# Altium PCB EE311_Example_Boost_PCB.PcbDoc
Units mm, origin at the board's own origin, x right, y up, seen from the top; angles counter-clockwise.
Board outline 68 x 69 mm, 2 copper layers (Top Layer, Bottom Layer); 67 components, 26 nets, 164 pads, 108 vias.
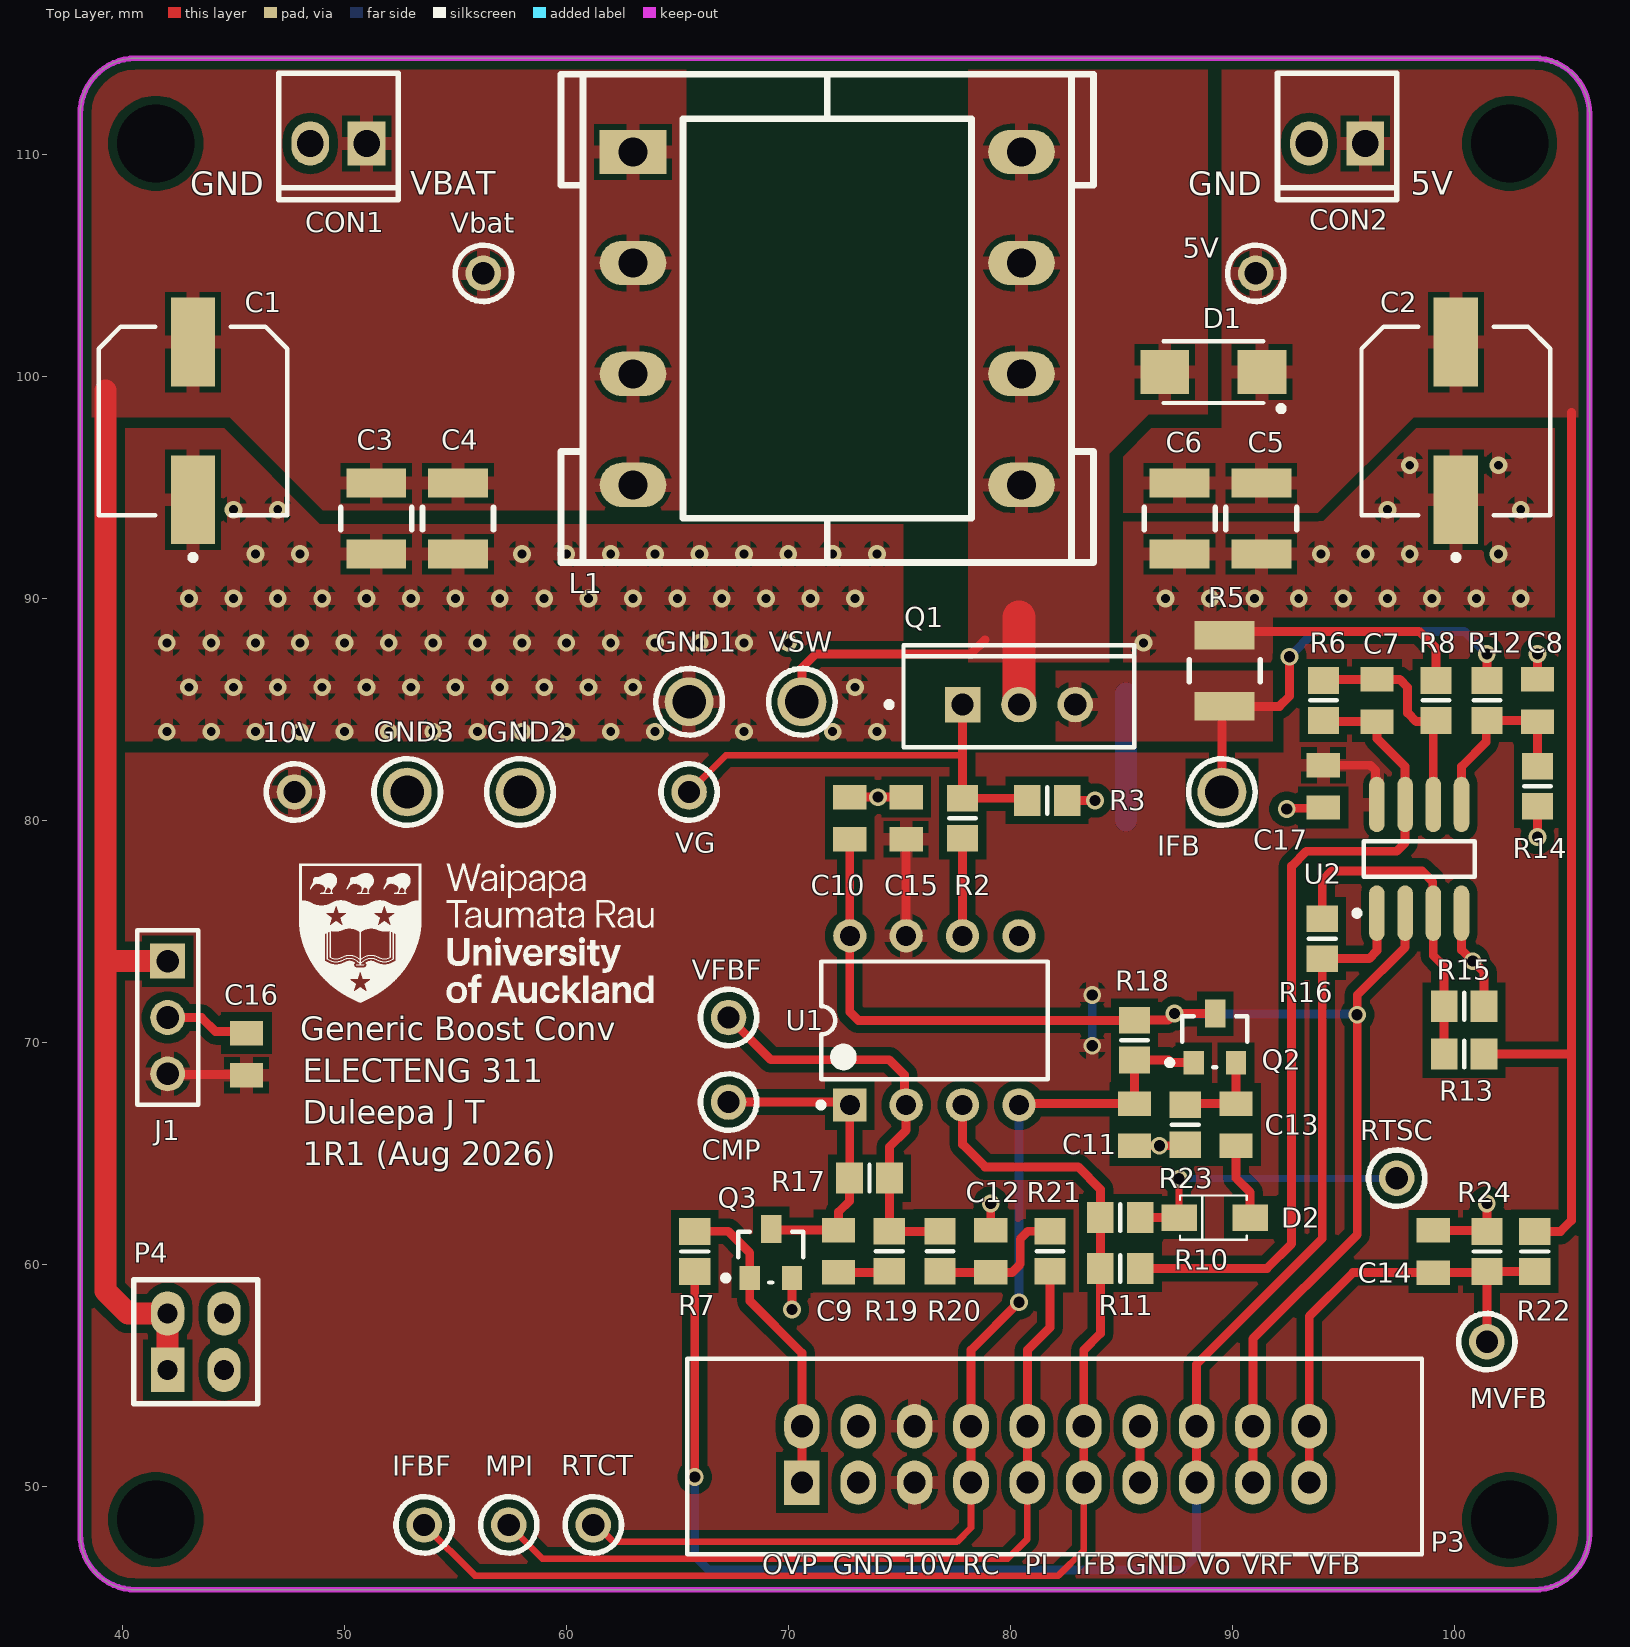
[diagram p0: Top Layer view]
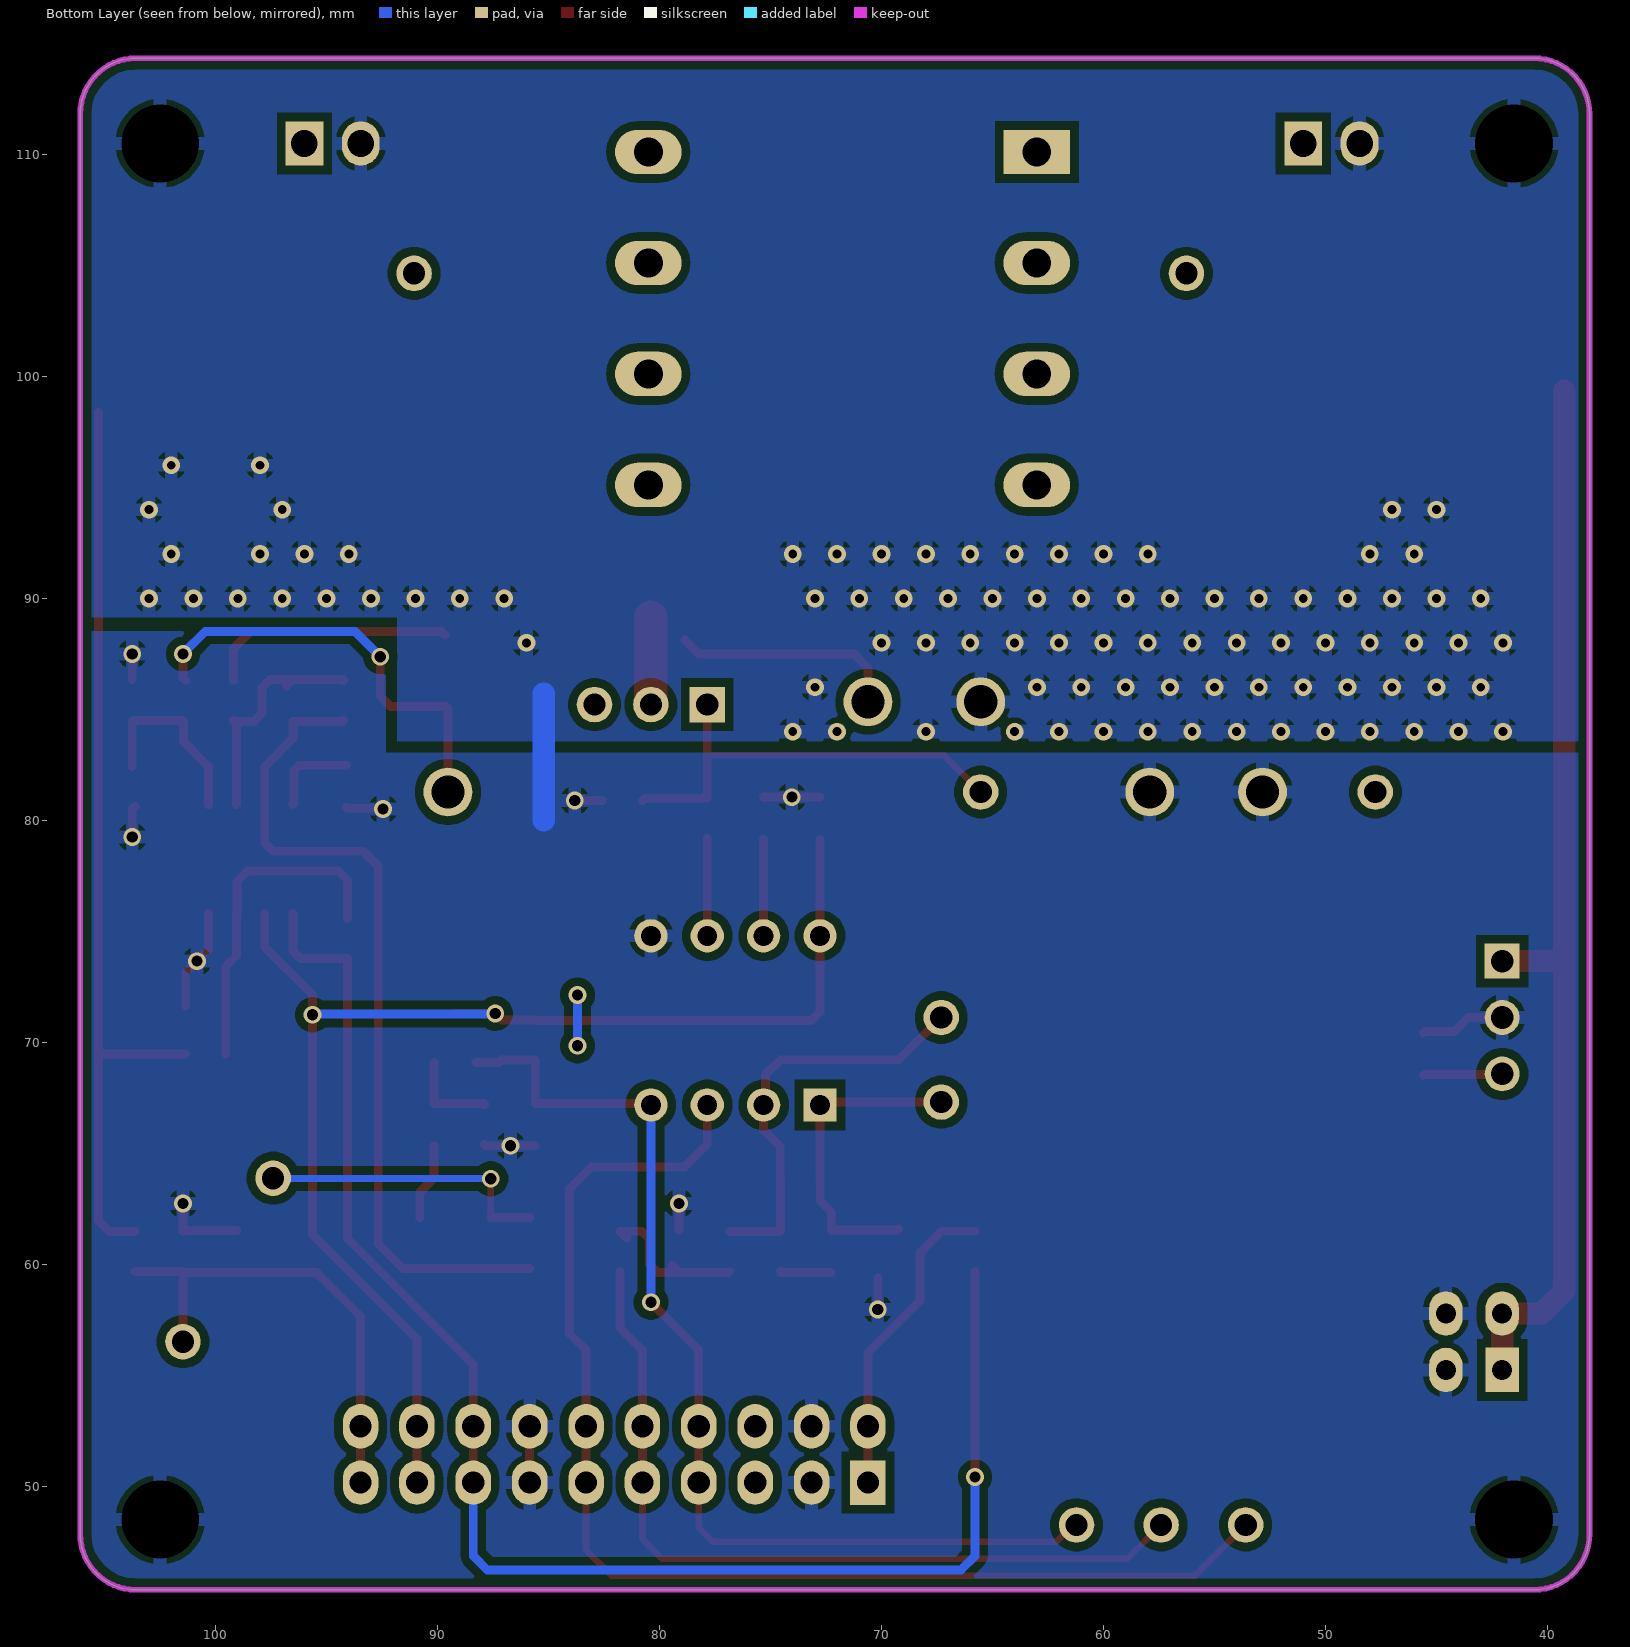
[diagram p1: Bottom Layer view, seen from below]

## Layer stack, top to bottom
Top Solder: solder mask 0.0102, Solder Resist, Dk 3.5
Top Layer: signal copper 0.0356
Dielectric 1: dielectric 0.32, FR-4, Dk 4.8
Bottom Layer: signal copper 0.0356
Bottom Solder: solder mask 0.0102, Solder Resist, Dk 3.5

## Board outline
38.1,47.839 38.1,111.839 cw(c40.6,111.839) 40.6,114.339 103.6,114.339 cw(c103.6,111.839) 106.1,111.839 106.1,47.839 cw(c103.6,47.839) 103.6,45.339 40.6,45.339 cw(c40.6,47.839)

## Design rules (kind name [scope] priority, off if disabled: settings)
BoardOutlineClearance [All] p1: gap=0.3 ignorepadtopadclearanceinfootprint=FALSE except(0.4: Arc-SplitBarrior Arc-SplitContinuation Track-SplitBarrior Track-SplitContinuation SMDPad-SplitBarrior SMDPad-SplitContinuation THPad-SplitBarrior THPad-SplitContinuation Via-SplitBarrior Via-SplitContinuation Fill-SplitBarrior Fill-SplitContinuation Poly-SplitBarrior Poly-SplitContinuation Region-SplitBarrior Region-SplitContinuation Text-SplitBarrior Text-SplitContinuation)
Clearance [All] p1: gap=0.381 ignorepadtopadclearanceinfootprint=TRUE
Height [All] p1: minheight=0 maxheight=50 prefheight=12.7
HoleSize [All] p1: absolutevalues=TRUE maxlimit=12 minlimit=0.25 maxpercent=80.000 minpercent=20.000
MinimumAnnularRing [All] p1: minimumring=0.13
MinimumSolderMaskSliver [All] p1: minsoldermaskwidth=0.1
PolygonConnect PolygonConnect_RShunt [InComponent('R5')] p1: connectstyle=Direct reliefconductorwidth=0.508 reliefentries=4 polygonreliefangle="90 Angle" airgapwidth=0.254
PolygonConnect [All] p2: connectstyle=Relief reliefconductorwidth=0.6 reliefentries=4 polygonreliefangle="90 Angle" airgapwidth=0.254
RoutingCorners [All] p1: cornerstyle=Round minsetback=2.54 maxsetback=2.54
RoutingVias [All] p1: holewidth=0.4 width=0.65 viastyle="Through Hole" minholewidth=0.25 minwidth=0.4 maxholewidth=1 maxwidth=2
SilkToSilkClearance [All] p1: silktosilkclearance=0.1
SilkToSolderMaskClearance [IsPad] p1: minsilkscreentomaskgap=0.1 clearancetoexposedcopper=TRUE
SolderMaskExpansion [All] p1: expansion=0.102 istentingtop=FALSE
SupplyNets "Schematic Supply Nets_4" [InNet('Vbat')] p1: voltage=0.000
SupplyNets "Schematic Supply Nets_3" [InNet('GND')] p2: voltage=0.000
SupplyNets "Schematic Supply Nets_2" [InNet('10V')] p3: voltage=0.000
SupplyNets "Schematic Supply Nets_1" [InNet('VREF')] p4: voltage=0.000
SupplyNets "Schematic Supply Nets" [InNet('5V')] p5: voltage=0.000
Width [All] p1: maxlimit=10.16 minlimit=0.127 preferedwidth=0.508
24 further rules are at their usual default settings.

## Components (designator, comment, footprint, x,y, rotation, side; value= is the part's Value field where it differs from the comment)
5V "TP TH" TP_TH_2.5mm 91.059,104.648 r0 top
10V "TP TH" TP_TH_2.5mm 47.752,81.28 r0 top
C1 "EEE-FK1K330P" FP-FKF-MFG 43.18,98 r90 top value=33µF
C2 "EEE-FK1K330P" FP-FKF-MFG 100.076,98 r90 top value=33µF
C3 "CCAP1210" C1210 51.435,93.599 r90 top
C4 "CCAP1210" C1210 55.118,93.599 r90 top
C5 "CCAP1210" C1210 91.313,93.599 r90 top
C6 "CCAP1210" C1210 87.63,93.599 r90 top
C7 "CCAP0805" C0805 96.52,85.405 r90 top
C8 "CCAP0805" C0805 103.759,85.405 r90 top
C9 "CCAP0805" C0805 72.263,60.59 r270 top
C10 "CCAP0805" C0805 72.771,80.099 r90 top
C11 "CCAP0805" C0805 85.598,66.294 r270 top
C12 "CCAP0805" C0805 79.121,60.59 r90 top
C13 "CCAP0805" C0805 90.17,66.294 r270 top
C14 "CCAP0805" C0805 99.06,60.579 r90 top
C15 "CCAP0805" C0805 75.311,80.099 r90 top
C16 "CCAP0805" C0805 45.593,69.469 r90 top
C17 "CCAP0805" C0805 94.107,81.534 r270 top
CMP "TP TH" TP_TH_2.5mm 67.31,67.31 r0 top
CON1 "HDR2X1" HDR2X1_2P54 51,110.5 r270 top
CON2 "HDR2X1" HDR2X1_2P54 96,110.5 r270 top
D1 "SSA34-E3/61T" FP-95400-MFG 89.154,100.203 r180 top
D2 "1N4148_SMT_SOD123" SOD123 89.154,62.103 r180 top
GND1 "TP TH" TP_TH_3mm 65.532,85.344 r0 top
GND2 "TP TH" TP_TH_3mm 57.912,81.28 r0 top
GND3 "TP TH" TP_TH_3mm 52.832,81.28 r0 top
IFB "TP TH" TP_TH_3mm 89.535,81.28 r0 top
IFBF "TP TH" TP_TH_2.5mm 53.594,48.26 r0 top
J1 "HDR3X1" FP-22-28-4035-MFG 42.037,71.12 r270 top
L1 "Inductor EFD20" EFD20 71.755,102.616 r0 top
MPI "TP TH" TP_TH_2.5mm 57.404,48.26 r0 top
MVFB "TP TH" TP_TH_2.5mm 101.473,56.515 r0 top
P3 "HDR10X2" HDR10X2_2P54 82.042,51.435 r0 top
P4 "HDR2X2_TH" HDR2X2_2P54_Male 43.307,56.515 r0 top
Q1 "IPP052N06L3" TO220VH 80.391,85.217 r90 top
Q2 "MMBT2222A" SOT23SM 89.217,70.155 r90 top
Q3 "MMBT2222A" SOT23SM 69.215,60.452 r90 top
R2 "RES0805" R0805 77.851,80.099 r90 top
R3 "RES0805" R0805 81.661,80.899 r180 top
R5 "RES1210" R1210 89.662,86.741 r270 top
R6 "RES0805" R0805 94.107,85.405 r90 top
R7 "RES0805" R0805 65.786,60.579 r90 top
R8 "RES0805" R0805 99.187,85.405 r90 top
R10 "RES0805" R0805 84.963,62.103 r180 top
R11 "RES0805" R0805 84.963,59.817 r0 top
R12 "RES0805" R0805 101.473,85.405 r90 top
R13 "RES0805" R0805 100.446,69.469 r0 top
R14 "RES0805" R0805 103.759,81.534 r90 top
R15 "RES0805" R0805 100.446,71.628 r180 top
R16 "RES0805" R0805 94.057,74.676 r90 top
R17 "RES0805" R0805 73.66,63.881 r180 top
R18 "RES0805" R0805 85.598,70.104 r90 top
R19 "RES0805" R0805 74.549,60.59 r270 top
R20 "RES0805" R0805 76.835,60.59 r90 top
R21 "RES0805" R0805 81.788,60.59 r90 top
R22 "RES0805" R0805 103.632,60.579 r90 top
R23 "RES0805" R0805 87.884,66.294 r270 top
R24 "RES0805" R0805 101.473,60.579 r270 top
RTCT "TP TH" TP_TH_2.5mm 61.214,48.26 r0 top
RTSC "TP TH" TP_TH_2.5mm 97.409,63.881 r0 top
U1 "UC3843NG4" DIP-8 76.581,70.993 r90 top
U2 "LT6221" SOIC8 98.425,78.269 r90 top
Vbat "TP TH" TP_TH_2.5mm 56.261,104.648 r0 top
VFBF "TP TH" TP_TH_2.5mm 67.31,71.12 r0 top
VG "TP TH" TP_TH_2.5mm 65.532,81.28 r0 top
VSW "TP TH" TP_TH_3mm 70.612,85.344 r0 top

## Footprints (in the part's own frame and the unit in brackets; to place one, negate y for a bottom-side part, rotate by r counter-clockwise, add the part's x,y. Pads: shape width x height; smd on the part's side, far side on the other; paste and mask are expansions set on the pad)
C0805 [mm]
  rect 1.1x1.5 smd: 1(-0.95,0) 2(0.95,0)
  body extent -1.1,-0.72 1.1,0.72, height 1.1
C1210 [mm]
  rect 1.3x2.7 smd: 1(-1.6,0) 2(1.6,0)
  silkscreen extent -0.5,-1.6 0.5,1.6, body extent -1.8,-1.4 1.8,1.4, height 1.24
DIP-8 [mm] "DIP, 8-Leads, Row Spacing 7.62mm, Pitch 2.54mm, Body 9.6x6.4mm"
  rect 1.5x1.5 hole 0.9: 1(-3.81,3.81)
  round 1.5 hole 0.9: 2(-3.81,1.27) 3(-3.81,-1.27) 4(-3.81,-3.81) 5(3.81,-3.81) 6(3.81,-1.27) 7(3.81,1.27) 8(3.81,3.81)
  silkscreen extent -3.93,-5.1 2.65,5.23, body extent -3.87,-5.71 4,5.71, height 4.19
EFD20 [mm]
  rect 3x2 hole 1.3: 1(-8.75,7.5)
  oval 3x2 hole 1.3: 2(-8.75,2.5) 3(-8.75,-2.5) 4(-8.75,-7.5) 5(8.75,-7.5) 6(8.75,-2.5) 7(8.75,2.5) 8(8.75,7.5)
  silkscreen extent -12,-11 12,11, body extent -11.33,-10.9 11.33,10.9, height 10.5
FP-22-28-4035-MFG [mm]
  rect 1.57x1.57 hole 1.02 paste-2539.97 mask+0: 1(-2.54,0)
  round 1.57 hole 1.02 paste-2539.97 mask+0: 2(0,0) 3(2.54,0)
  silkscreen extent -3.94,-1.37 3.94,1.37, body extent -4.04,-1.47 4.04,1.47, height 0.25
FP-95400-MFG [mm]
  rect 2.2x2 smd paste+0 mask+0: 1(-2.19,0) 2(2.19,0)
  silkscreen extent -3.17,-1.4 2.25,1.78, body extent -2.74,-1.5 2.74,1.5, height 0.25
FP-FKF-MFG [mm]
  rect 4x2 smd paste+0 mask+0: 1(-3.55,0) 2(3.55,0)
  silkscreen extent -6.27,-4.25 4.25,4.25, body extent -5.8,-4.5 5.8,4.5, height 0.25
HDR2X1_2P54 [mm] "Polarised Header 2 way"
  rect 2x1.7 hole 1.2: 1(0,0)
  oval 2x1.7 hole 1.2: 2(0,-2.54)
  silkscreen extent -3.16,-3.96 2.54,1.42, body extent -3.3,-3.64 3.18,1.44, height 10.09
HDR2X2_2P54_Male [mm] "IDC 2X2 Way 2.54 pitch"
  rect 1.5x2 hole 0.9: 1(-1.27,-1.27)
  oval 1.5x2 hole 0.9 paste-2539.97: 2(-1.27,1.27)
  oval 1.5x2 hole 0.9: 3(1.27,-1.27) 4(1.27,1.27)
  silkscreen extent -2.79,-2.79 2.79,2.79, body extent -2.54,-2.54 2.54,2.54, height 9.5
HDR10X2_2P54 [mm]
  rect 1.6x2 hole 1: 1(-11.43,-1.27)
  oval 1.6x2 hole 1: 2(-11.43,1.27) 3(-8.89,-1.27) 4(-8.89,1.27) 5(-6.35,-1.27) 6(-6.35,1.27) 7(-3.81,-1.27) 8(-3.81,1.27) 9(-1.27,-1.27) 10(-1.27,1.27) 11(1.27,-1.27) 12(1.27,1.27) 13(3.81,-1.27) 14(3.81,1.27) 15(6.35,-1.27) 16(6.35,1.27) 17(8.89,-1.27) 18(8.89,1.27) 19(11.43,-1.27) 20(11.43,1.27)
  silkscreen extent -16.6,-4.5 16.51,4.32, body extent -16.6,-4.5 16.6,4.4, height 9.25
R0805 [mm]
  rect 1.2x1.4 smd: 1(-0.9,0) 2(0.9,0)
  silkscreen extent 0,-0.6 0,0.6, body extent -1.07,-0.7 1.07,0.7, height 0.65
R1210 [mm] "Chip Resistor, 2-Leads, IPC Low Density"
  rect 1.3x2.7 smd: 1(-1.6,0) 2(1.6,0)
  silkscreen extent -0.5,-1.6 0.5,1.6, body extent -1.6,-1.25 1.6,1.25, height 0.61
SOD123 [mm] "SOD-123; 2 Leads; Body 2.7 x 1.6 mm, (LxW)"
  rect 1.6x1.2 smd: 1(-1.65,0) 2(1.55,0)
  silkscreen extent -1.5,-1 1.5,1, body extent -1.8,-0.86 1.8,0.86, height 1.21
SOIC8 [mm]
  oval 2.5x0.7 smd: 1(-2.45,1.905) 2(-2.45,0.635) 3(-2.45,-0.635) 4(-2.45,-1.905) 5(2.45,-1.905) 6(2.45,-0.635) 7(2.45,0.635) 8(2.45,1.905)
  silkscreen extent -2.57,-2.5 0.8,2.93, body extent -3.1,-2.5 3.1,2.5, height 1.9
SOT23SM [mil] "SOT23 Medium Intensity"
  rect 42x36 smd: 1(-42,37.49) 2(-42,-37.51)
  rect 50x36 smd: 3(45,-0.51)
  silkscreen extent -50,-58 40,85, body extent -46,-57 46,57, height 39
TO220VH [mm] "FM, 3-Leads, Body 10.03x8.98mm, Pitch 2.54mm"
  rect 1.6x1.6 hole 1: 1(0,2.54)
  round 1.6 hole 1: 2(0,0) 3(0,-2.54)
  silkscreen extent -1.93,-5.2 2.67,5.97, body extent -1.93,-5.2 2.67,5.2, height 20.75
TP_TH_2.5mm [mm] "Keystone through hole TP"
  round 1.6 hole 1: 1(0,0)
  silkscreen extent -1.27,-1.27 1.27,1.27, body extent -1.59,-1.59 1.59,1.59, height 5.59
TP_TH_3mm [mm] "Keystone through hole TP"
  round 2.2 hole 1.5: 1(0,0)
  silkscreen extent -1.5,-1.5 1.5,1.5, body extent -1.59,-1.59 1.59,1.59, height 5.59

## Part data
5V 10V CMP IFBF MPI MVFB RTCT RTSC Vbat VFBF VG: library part CMP-046-000000-3, "Testpoint through hole / Keystone compact / 5000 - Red / 5001 - Black / 5002 - White / 5003 - Orange / 5004 - Yellow", Design Item ID="TP TH", Source="UoAPE_Connectors and Mechanical.SchLib"
C1 C2: library part CMP-001-00000-1, "Aluminum Electrolytic Capacitor, Polarized, Aluminum (wet), 80V, 20% +Tol, 20% -Tol, 33uF, Surface Mount, 3333", Capacitor Type=Aluminium, Case/Package=3333, Max Operating Temperature=105°C, Min Operating Temperature=-55°C, Dielectric Material=Aluminium, Height=10.2mm, Mounting Technology="Surface Mount", Pins=2, RoHS Compliant=Yes
C3 C4 C5 C6: library part CMP-003-000003-2, "Capacitor 1210", Design Item ID=CCAP1210, Source=CommonSymbols_V1.SchLib
C7 C8 C9 C10 C11 C12 C13 C14 C15 C16 C17: library part CMP-003-000002-2, "Capacitor 0805", Design Item ID=CCAP0805, Source=CommonSymbols_V1.SchLib
CON1 CON2: library part CMP-004-000000-7, "Header 2X1", Design Item ID=HDR2X1, Source=CommonSymbols_V1.SchLib
D1: library part CMP-00006-3, "Rectifier Diode, Schottky, 1 Phase, 1 Element, 3A, 40V V(RRM), Silicon, DO-214AC", Average Rectified Current=3A, Case/Package=SMA, Forward Voltage=490mV, Max Forward Surge Current (Ifsm)=75A, Max Operating Temperature=150°C, Max Repetitive Reverse Voltage (Vrrm)=40V, Max Reverse Current=200uA, Min Operating Temperature=-65°C, Package Body Material=Plastic, Package Quantity=1800, Package Shape=Rectangular, Package Style="SMALL OUTLINEMeter", Peak Reflow Temperature (Cel)=260°C, Time @ Peak Reflow Temperature-Max (s)=40s, Application(s)=EFFICIENCY, Current Rating=3A, Diode Element Material=SILICON, Diode Type=RECTIFIER, Forward Current=3A, Height=2.087mm, JEDEC-95 Code=DO-214AC, JESD-30 Code=R-PDSO-C2, JESD-609 Code=e3, Lead Free="Lead Free", Length=4.5mm, Max Output current=3A, Max Reverse Leakage Current=200uA, Max Reverse Voltage (DC)=40V, Max Surge Current=75A, Moisture Sensitivity Level=1, Mounting Technology="Surface Mount", Non-rep Pk Forward Current-Max=75A, Number of Elements=1, Number of Phases=1, Output Current=3A, Packaging="Tape and Reel", Peak Non-Repetitive Surge Current=75A, Pins=2, Polarity=Standard, Qualification Status="Not Qualified", Radiation Hardening=No, Reach SVHC Compliant=Unknown, Rep Pk Reverse Voltage-Max=40V, Reverse Voltage=40V, RoHS Compliant=Yes, Series=-, Surface Mount=Yes, Technology=SCHOTTKY, Terminal Finish=Tin, Terminal Form="C BEND", Terminal Position=DUAL, Voltage Rating (DC)=40V, Width=2.79mm
D2: library part CMP-004-00012-1, "DIODE GEN PURP 100V 300MA SOD123", Base Part Number=1N4148W, Capacitance @ Vr, F="2pF @ 0V, 1MHz", Case/Package=SOD-123, Current - Average Rectified (Io)=150mA, Manufacturer="Diodes Incorporated", Manufacturer Part Number=1N4148W-13-F, Operating Temperature - Junction="-65°C ~ 150°C", Category="Discrete Semiconductor Products", Component Type=Standard, ComponentLink1Description=https://www.diodes.com/assets/Datasheets/ds30086.pdf, ComponentLink1URL=https://www.diodes.com/assets/Datasheets/ds30086.pdf, Design Item ID=1N4148_SMT_SOD123, Diode Type=Standard, Mounting Type="Surface Mount", Packaging="Cut Tape (CT)", Part Status=Active, Pins=2, Pricing 1="1=0.33, 10=0.292, 100=0.1586, 500=0.0976, 1000=0.06656 (NZD)", RoHS="RoHS Compliant", Source=EE209_SchLib.SchLib, Speed="Small Signal =< 200mA (Io), Any Speed", Stock 1=5282, Supplier Device Package=SOD-123
GND1 GND2 GND3 IFB VSW: library part CMP-046-000000-4, "Testpoint through hole / Keystone compact / 5000 - Red / 5001 - Black / 5002 - White / 5003 - Orange / 5004 - Yellow", Design Item ID="TP TH", Source="UoAPE_Connectors and Mechanical.SchLib"
J1: library part CMP-002-00030-1, "22-28-4035, Board Connector, 3 Contact(s), 1 Row(s), Male, Straight, 0.1 inch Pitch, Solder Terminal, Receptacle", Max Operating Temperature=75°C, Min Operating Temperature=0°C, Connector Type="BOARD CONNECTOR", Contact Gender=Male, Mounting Technology=Board, Number of Contacts=3, Number Of PCB Rows=1, RoHS Compliant=Yes, Terminal Pitch=2.54mm
L1: library part CMP-006-000001-2, "Inductor with core", Design Item ID="Inductor EFD20", Source=CommonSymbols_V1.SchLib
P3: library part CMP-004-000004-1, "Header, 10-Pin, Dual row", Design Item ID=HDR10X2, Source=CommonSymbols_V1.SchLib
P4: library part CMP-002-00008-6, "Male Header, 4-Pin, Dual row", Design Item ID=HDR2X2, Source=CommonSymbols_V1.SchLib
Q1: library part CMP-011-000031-1, "N-Channel OptiMOS 3 Power-Transistor, 60 V VDS, 80 A ID, -55 to 175 degC, PG-TO220-3-1, Tube, Green", Manufacturer=Infineon, PartNumber="IPP052N06L3 G", ComponentLink1Description="Manufacturer URL", ComponentLink1URL=http://www.infineon.com/, ComponentLink2Description=Datasheet, ComponentLink2URL=http://www.infineon.com/dgdl/IPP_B052N06L3_Rev2.4.pdf?folderId=db3a304313b8b5a60113cee8763b02d7&fileId=db3a30432313ff5e0123a32d97c125b6, ComponentLink3Description="Package Specification", ComponentLink3URL=http://www.infineon.com/dgdl/IPP028N08N3_Rev1%5B1%5D.0.pdf?folderId=db3a304313b8b5a60113cee8763b02d7&fileId=db3a30432313ff5e0123a3c08e7326b5, DatasheetVersion="Rev. 2.4", Design Item ID=IPP052N06L3, Green=TRUE, Halogen-free=TRUE, ID (max)="80 A", IDpuls (max)="320 A", Mounting Technology="Through Hole", PackageDescription="3-Pin Plastic (Green) Transistor Single Outline Package, 10.03 x 8.98 mm Body, 2.54 mm Pitch", PackageReference=PG-TO220-3-1, PackageVersion="Rev. 05, 08/2007", Packing=Tube, Polarity=N, Ptot (max)="115 W", QG="37 nC", RDS (on) (max)="5 mOhm", RDS (on) (max) (@4.5V)="8.3 mOhm", Rth="1.3 K/W", RthJA (max)="62 K/W", RthJC (max)="1.3 K/W", Source=CommonSymbols_V1.SchLib, VDS (max)="60 V", VGS(th) (max)="2.2 V", VGS(th) (min)="1.2 V"
Q2 Q3: library part CMP-011-000025-1, "General Purpose Transistor, NPN Silicon, 3-Pin SOT-23, Pb-Free, Tape and Reel", Manufacturer="On Semiconductor", PartNumber=MMBT2222ALT1G, ComponentLink1Description="Manufacturer URL", ComponentLink1URL=http://www.onsemi.com/, ComponentLink2Description=Datasheet, ComponentLink2URL=http://www.onsemi.cn/pub_link/Collateral/MMBT2222LT1-D.PDF, ComponentLink3Description="Package Specification", ComponentLink3URL=http://www.onsemi.cn/pub_link/Collateral/318-08.PDF, DatasheetVersion="Rev. 10", Design Item ID=MMBT2222A, fT Min (MHz)=300, IC Continuous (A)=0.6, Mounting Technology="Surface Mount", PackageDescription="3-Pin Small Outline Transistor, Body 2.92 x 1.3 mm, Pitch 0.95 mm", PackageReference=SOT-23-3-318-08, PackageVersion="Rev. AP, 11/2009", Packing="Tape and Reel", Polarity=NPN, RoHS=TRUE, Source=CommonSymbols_V1.SchLib
R2 R3 R6 R7 R8 R10 R11 R12 R13 R14 R15 R16 R17 R18 R19 R20 R21 R22 R23 R24: library part CMP-010-000002-2, "Resistor 0805", Design Item ID=RES0805, Source=CommonSymbols_V1.SchLib
R5: library part CMP-009-00000-1, "Resistor 1210", Design Item ID=RES1206, Source=CommonSymbols_V1.SchLib
U1: library part CMP-019-00013-1, "Single ended 500KHz current mode PWM controller with 8.4V/7.6V UVLO 100% duty cycle, 0C to 70C 8-PDIP 0 to 70", Case/Package=PDIP, Clock Frequency=500kHz, Frequency=450kHz, Manufacturer Lifecycle Status=ACTIVE, Max Operating Temperature=70°C, Max Supply Voltage=30V, Min Operating Temperature=0°C, Nominal Supply Voltage=25V, Output Voltage=13.5V, Duty Cycle=100%, Fall Time=50ns, Height=5.08mm, Lead Free="Lead Free", Length=9.81mm, Lifecycle Status=Production, Max Duty Cycle=100%, Number of Outputs=1, Pins=8, Rise Time=50ns, RoHS=Compliant, Switching Frequency=500kHz, Thickness=3.9mm, Topology="Boost, Buck, Buck-Boost, Flyback", Weight=528.605208mg, Width=6.35mm
U2: library part CMP-008-000000-4, "IC OPAMP LT6221 DUAL SM", Manufactuer="Linear Technology", Manufacturer-PN=LT6221CS8#TRPBF, Size/Package=S8, Assembly Method="Surface Mount", Category=OpAmp, Design Item ID=LT6221, Item Type=Item, Path="ece/ts/Lists/Stock Inventory", Source=CommonSymbols_V1.SchLib, Status=Active, Supplier1=Arrow, Supplier1-PN=LT6221CS8#TRPBF, Supplier2=Digikey, Supplier2-PN=LT6221CS8#PBF-ND, UoA Stock#=OPA000102

## Free pads (board coordinates)
  round 1.524 hole 3.5: 2(41.5,48.5) 2(41.5,110.5) 2(102.5,48.5) 2(102.5,110.5)

## Via types
v1: diameter 0.8, hole 0.4, Top Layer to Bottom Layer, 89 vias
v2: diameter 0.8, hole 0.5, Top Layer to Bottom Layer, 19 vias

## Nets (pads, with @x,y where several pads share a name; then routed paths per layer and width w, separated by ;. In a path a pad name is that pad's centre, name@x,y a point inside that pad or via, vN(x,y) a via of type N, cw(c..) or ccw(c..) an arc to the next point about the centre after c; other vN are vias at no path point)
5V: 5V.1 C2.2 C5.2 C6.2 CON2.1 D1.1 R13.2 R22.2 | length 42.2
  Top Layer w0.4: R13.2 105.283,69.469 ; R22.2 104.786,61.479 105.283,61.976 105.283,69.469 ; 105.283,98.379 105.283,69.469
10V: 10V.1 C15.1 C16.1 C17.1 J1.3 P3.5 P3.6 U1.7 U2.8 | length 14.2
  Top Layer w0.4: J1.3 42.068,68.549 45.562,68.549 C16.1 ; U1.7 C15.1 ; C17.1 96.228,82.484 96.463,82.25 96.463,80.776 U2.8
  Bottom Layer w0.4: v2(83.693,69.85) v2(83.693,72.136)
COMP: C9.1 CMP.1 Q3.3 R17.2 U1.1 | length 14.4
  Top Layer w0.4: CMP.1 72.644,67.31 U1.1 72.771,63.892 R17.2 72.76,62.854 72.263,62.357 C9.1 69.283,61.54 Q3.3
GND: C1.1 C2.1 C3.1 C4.1 C5.1 C6.1 C8.2 C10.2 C11.2 C12.2 C14.2 C15.2 C16.2 C17.2 CON1.2 CON2.2 GND1.1 GND2.1 GND3.1 J1.2 P3.3 P3.4 P3.13 P3.14 P4.3 P4.4 pad.2 Q3.2 R3.1 R5.1 R8.2 R14.1 R15.1 R23.2 R24.1 U1.5 U2.4 | length 44.7
  Top Layer w0.4: J1.2 43.561,71.12 44.196,70.485 45.527,70.485 C16.2 ; v2(70.168,57.969) Q3.2 ; C10.2 v2(74.041,81.049) C15.2 ; C12.2 v2(79.121,62.738) ; R3.1 v2(83.82,80.899) ; C11.2 v2(86.716,65.344) 87.834,65.344 R23.2 ; P3.13 P3.14 ; R5.1 89.84,88.519 98.425,88.519 99.187,87.757 R8.2 ; v2(92.456,80.518) 92.489,80.551 94.074,80.551 C17.2 ; C14.2 101.423,61.529 R24.1 ; U2.4 100.33,74.168 v2(100.838,73.66) 101.346,73.152 R15.1 ; R24.1@101.409,61.542 101.473,61.606 v2(101.473,62.738) ; R14.1@103.632,80.634 103.759,80.507 v2(103.759,79.248) ; C8.2 v2(103.759,87.503)
  Bottom Layer w1: 85.217,80.01 85.217,85.725
  other v1: 42,84 44,84 46,84 48,84 50,84 52,84 54,84 56,84 58,84 60,84 62,84 64,84 68,84 72,84 74,84 43,86 45,86 47,86 49,86 51,86 53,86 55,86 57,86 59,86 61,86 63,86 73,86 42,88 44,88 46,88 48,88 50,88 52,88 54,88 56,88 58,88 60,88 62,88 64,88 66,88 68,88 70,88 86,88 43,90 45,90 47,90 49,90 51,90 53,90 55,90 57,90 59,90 61,90 63,90 65,90 67,90 69,90 71,90 73,90 87,90 89,90 91,90 93,90 95,90 97,90 99,90 101,90 103,90 46,92 48,92 58,92 60,92 62,92 64,92 66,92 68,92 70,92 72,92 74,92 94,92 96,92 98,92 102,92 45,94 47,94 97,94 103,94 98,96 102,96
IFB: IFB.1 Q1.3 R5.2 R12.2 | length 19.8
  Top Layer w0.4: IFB.1 89.535,85.014 R5.2 92.126,85.141 92.583,85.598 v2(92.583,87.376) ; R12.2@101.346,86.305 101.473,86.432 v2(101.473,87.503)
  Bottom Layer w0.4: v2(92.583,87.376) 93.726,88.519 100.457,88.519 v2(101.473,87.503)
IFB_F: IFBF.1 P3.11 P3.12 R10.2 R11.1 U1.3 | length 56.5
  Top Layer w0.3: IFBF.1 55.88,45.974 82.169,45.974 83.312,47.117 P3.11
  Top Layer w0.4: U1.3 77.851,65.405 78.867,64.389 83.058,64.389 84.063,63.384 R10.2 R11.1 84.063,56.885 83.312,56.134 P3.12 P3.11
MCU_PI: MPI.1 P3.9 P3.10 R21.1 | length 36.9
  Top Layer w0.3: MPI.1 58.928,46.736 79.883,46.736 80.772,47.625 P3.9
  Top Layer w0.4: P3.9 P3.10 80.772,56.134 81.788,57.15 R21.1
MCU_VFB: C14.1 MVFB.1 P3.19 P3.20 R22.1 R24.2 | length 21.7
  Top Layer w0.4: P3.19 P3.20 93.472,57.658 95.443,59.629 C14.1 101.423,59.629 R24.2 ; MVFB.1 R24.2 ; R22.1 R24.2
NetC7_1: C7.1 R6.1 R11.2 U2.7 | length 38.1
  Top Layer w0.4: R11.2 91.567,59.817 92.675,60.925 92.675,77.943 93.345,78.613 97.409,78.613 97.79,78.994 U2.7 97.79,82.423 96.52,83.693 C7.1 94.284,84.455 R6.1@94.234,84.505
NetC7_2: C7.2 R6.2 R8.1 U2.6 | length 10.6
  Top Layer w0.4: R6.2@94.234,86.305 94.284,86.355 C7.2 ; C7.2@96.811,86.064 C7.2 ; U2.6 99.06,84.378 R8.1 ; R8.1@99.06,84.455 98.298,84.455 97.906,84.847 97.906,85.99 97.541,86.355 C7.2
NetC8_1: C8.1 R12.1 R14.2 U2.5 | length 8.6
  Top Layer w0.4: U2.5 100.33,82.423 101.446,83.539 101.446,84.478 R12.1 103.709,84.505 C8.1 R14.2
NetC9_2: C9.2 R19.2 | length 2.3
  Top Layer w0.4: C9.2 74.499,59.64 R19.2
NetC12_1: C12.1 R20.1 R21.2 | length 7.3
  Top Layer w0.4: R20.1 76.885,59.64 C12.1 ; C12.1@79.434,59.953 C12.1 ; R21.2@81.475,61.177 R21.2 80.794,61.49 80.452,61.148 80.452,60.005 80.087,59.64 C12.1
NetC13_1: C13.1 Q2.2 R23.1 | length 4.2
  Top Layer w0.4: R23.1 87.934,67.244 C13.1 Q2.2
NetC13_2: C13.2 D2.1 | length 3.5
  Top Layer w0.4: C13.2 90.17,63.881 90.804,63.247 D2.1
NetR13_1: R13.1 R15.2 R16.2 U2.3 | length 15.1
  Top Layer w0.4: R16.2 94.057,77.293 94.488,77.724 98.552,77.724 99.037,77.239 99.037,75.842 U2.3 99.06,73.914 99.546,73.428 R15.2 R13.1
OVP: P3.1 P3.2 Q3.1 R7.2 | length 14.2
  Top Layer w0.4: R7.2@65.786,61.49 67.288,61.49 68.263,60.515 Q3.1 68.263,58.356 70.612,56.007 P3.2 P3.1
RT/CT: C11.1 P3.7 P3.8 Q2.1 R18.1 RTCT.1 U1.4 | length 47.4
  Top Layer w0.3: RTCT.1 61.37,48.26 62.132,47.498 77.597,47.498 78.232,48.133 P3.7
  Top Layer w0.4: P3.7 P3.8 78.232,56.134 v2(80.391,58.293) ; U1.4 80.452,67.244 C11.1 R18.1 87.133,69.204 87.249,69.088 Q2.1
  Bottom Layer w0.4: v2(80.391,58.293) U1.4
RT/CT_SC: D2.2 R10.1 RTSC.1 | length 13.3
  Top Layer w0.3: D2.2 v2(87.604,63.855)
  Top Layer w0.4: R10.1 D2.2
  Bottom Layer w0.3: v2(87.604,63.855) 87.617,63.868 97.396,63.868 RTSC.1
Vbat: C1.2 C3.2 C4.2 CON1.1 J1.1 L1.1 L1.2 L1.3 L1.4 P4.1 P4.2 Vbat.1 | length 49.1
  Top Layer w1: 39.243,99.366 39.243,73.66 ; P4.1 P4.2 40.259,57.785 39.243,58.801 39.243,73.66 ; J1.1 39.243,73.66
VFB_F: R17.1 R19.1 R20.2 U1.2 VFBF.1 | length 18.6
  Top Layer w0.4: VFBF.1 69.215,69.215 74.549,69.215 75.231,68.533 75.231,67.263 U1.2 75.311,66.04 74.56,65.289 R17.1 ; R19.1@74.559,61.49 R17.1 ; R19.1@74.56,61.479 R20.2@76.824,61.479
VG: R2.1 U1.6 | length 4.4
  Top Layer w0.4: U1.6 R2.1
VGD: Q1.1 R2.2 R3.2 VG.1 | length 20.2
  Top Layer w0.3: VG.1 67.183,82.931 77.851,82.931
  Top Layer w0.4: Q1.1 77.851,82.931 R2.2 80.661,80.999 R3.2
Vo: P3.15 P3.16 R7.1 R16.1 U2.1 | length 69.5
  Top Layer w0.4: v2(65.786,50.419) R7.1 ; P3.15 P3.16 88.392,55.499 94.057,61.164 R16.1 96.167,73.776 96.52,74.129 U2.1
  Bottom Layer w0.4: v2(65.786,50.419) 65.786,46.863 66.421,46.228 87.757,46.228 88.392,46.863 P3.15
VREF: C10.1 P3.17 P3.18 Q2.3 R18.2 U1.8 U2.2 | length 61.3
  Top Layer w0.4: C10.1 U1.8 72.771,71.374 73.152,70.993 R18.2@85.598,70.993 ; R18.2 87.111,71.004 v2(87.405,71.298) Q2.3 ; P3.17 P3.18 90.932,56.642 95.631,61.341 95.631,72.136 97.79,74.295 U2.2
  Bottom Layer w0.4: v2(87.405,71.298) 87.43,71.272 95.606,71.272 v2(95.631,71.247)
VSW: D1.2 L1.5 L1.6 L1.7 L1.8 Q1.2 VSW.1 | length 14.2
  Top Layer w0.4: VSW.1 70.612,86.868 71.247,87.503 78.232,87.503 78.867,88.138
  Top Layer w1.5: Q1.2 80.391,89.154

## Polygon pours and split planes (outlines as drawn)
10V on Top Layer "10V_L01_P008" (solid, pour order 8): 38.101,45.339 106.1,45.339 106.1,88.519 92.329,88.519 92.329,83.058 37.964,83.058
GND on Top Layer "GND_L01_P005" (solid, pour order 5): 91.821,87.122 91.821,89.154 104.521,89.154 104.521,97.663 98.298,97.663 94.107,93.472 85.09,93.472 85.09,87.122
GND on Top Layer "GND_L01_P001" (solid, pour order 1): 40.005,97.663 44.577,97.663 48.895,93.345 75.184,93.345 75.184,83.566 40.005,83.566
5V on Top Layer "5V_L01_P004" (solid, pour order 4): 85.09,93.853 93.853,93.853 98.171,98.171 106.1,98.171 106.1,114.339 89.535,114.339 89.535,97.663 86.36,97.663 85.09,96.393
IFB on Top Layer "IFB_L01_P003" (solid, pour order 3): 82.042,83.566 82.042,86.741 91.821,86.741 91.821,83.566
VSW on Top Layer "VSW_L01_P002" (solid, pour order 2): 78.105,87.122 78.105,114.339 88.9,114.339 88.9,98.298 86.233,98.298 84.455,96.52 84.455,87.122
Vbat on Top Layer "VBAT_L01_P000" (solid, pour order 0): 65.405,114.339 65.405,93.98 49.022,93.98 44.831,98.171 38.481,98.171 38.481,114.339
GND on Bottom Layer "GND_L02_P007" (solid, pour order 7): 38.101,45.339 106.1,45.339 106.1,88.519 92.329,88.519 92.329,83.058 37.964,83.058
GND on Bottom Layer "GND_L02_P006" (solid, pour order 6): 38.227,114.339 106.1,114.339 106.1,89.154 91.821,89.154 91.821,83.566 38.227,83.566

## Keep-outs
Keep-Out Layer:
  lines w0.254: 38.1,47.839 ccw(c40.6,47.839) 40.6,45.339 ; 38.1,47.839 ccw(c40.6,47.839) 40.6,45.339 ; 38.1,47.839 38.1,111.839 ; 38.1,47.839 38.1,111.839 ; 38.1,111.839 cw(c40.6,111.839) 40.6,114.339 ; 38.1,111.839 cw(c40.6,111.839) 40.6,114.339 ; 40.6,45.339 103.6,45.339 ; 40.6,45.339 103.6,45.339 ; 40.6,114.339 103.6,114.339 ; 40.6,114.339 103.6,114.339 ; 103.6,45.339 ccw(c103.6,47.839) 106.1,47.839 ; 103.6,45.339 ccw(c103.6,47.839) 106.1,47.839 ; 103.6,114.339 cw(c103.6,111.839) 106.1,111.839 ; 103.6,114.339 cw(c103.6,111.839) 106.1,111.839 ; 106.1,47.839 106.1,111.839 ; 106.1,47.839 106.1,111.839

## Other copper
Top Layer:
  pour cut-out: 87.884,82.804 91.186,82.804 91.186,79.629 87.884,79.629

## Silkscreen, mask and mechanical layers (free items; w line width, h text height)
Top Overlay:
  drawing of 44 lines, arcs and shapes, not listed
  text "VBAT" at 52.96,107.823 h1.8
  text "5V" at 98.044,107.823 h1.8
  text "GND" at 43.053,107.803 h1.8
  text "GND" at 88.011,107.803 h1.8
  text "Generic Boost Conv" at 48.006,69.742 h1.8
  text "ELECTENG 311" at 48.133,67.839 h1.8
  text "Duleepa J T" at 48.133,65.979 h1.8
  text "1R1 (Aug 2026)" at 48.133,64.093 h1.8
  text "OVP" at 68.834,45.736 h1.5
  text "GND" at 72.009,45.736 h1.5
  text "10V" at 75.184,45.749 h1.5
  text "RC" at 77.851,45.736 h1.5
  text "PI" at 80.645,45.753 h1.5
  text "IFB" at 82.931,45.753 h1.5
  text "GND" at 85.217,45.736 h1.5
  text "Vo" at 88.393,45.753 h1.5
  text "VRF" at 90.425,45.753 h1.5
  text "VFB" at 93.473,45.753 h1.5